# Altium PCB reflow.PcbDoc
Units mm, origin at the board's own origin, x right, y up, seen from the top; angles counter-clockwise.
Board outline 50 x 50 mm, 2 copper layers (Top Layer, Bottom Layer); 59 components, 56 nets, 199 pads, 98 vias.
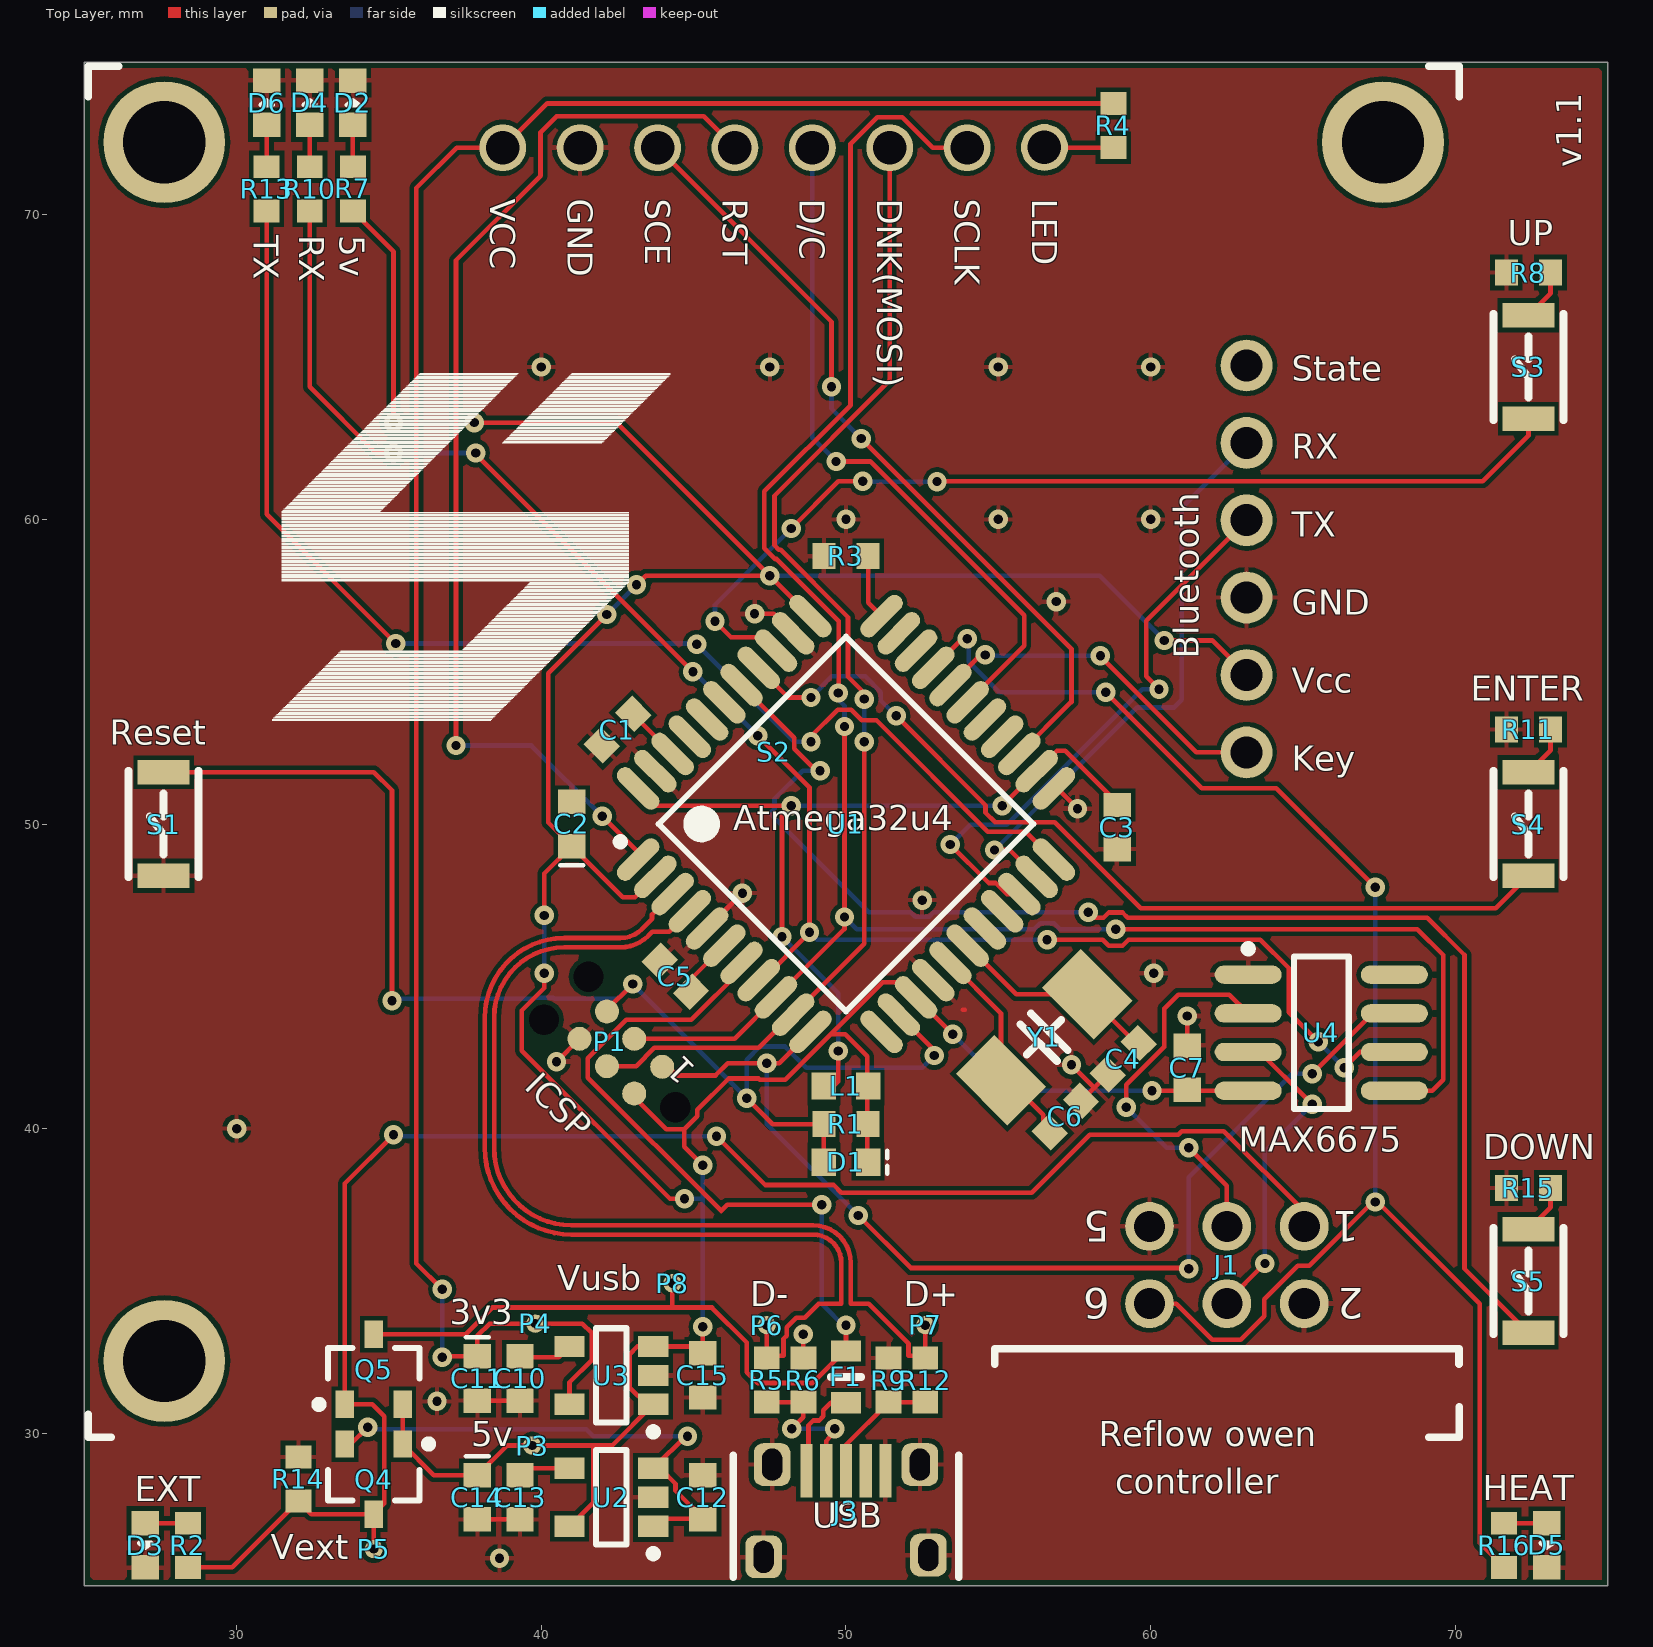
[diagram p0: Top Layer view]
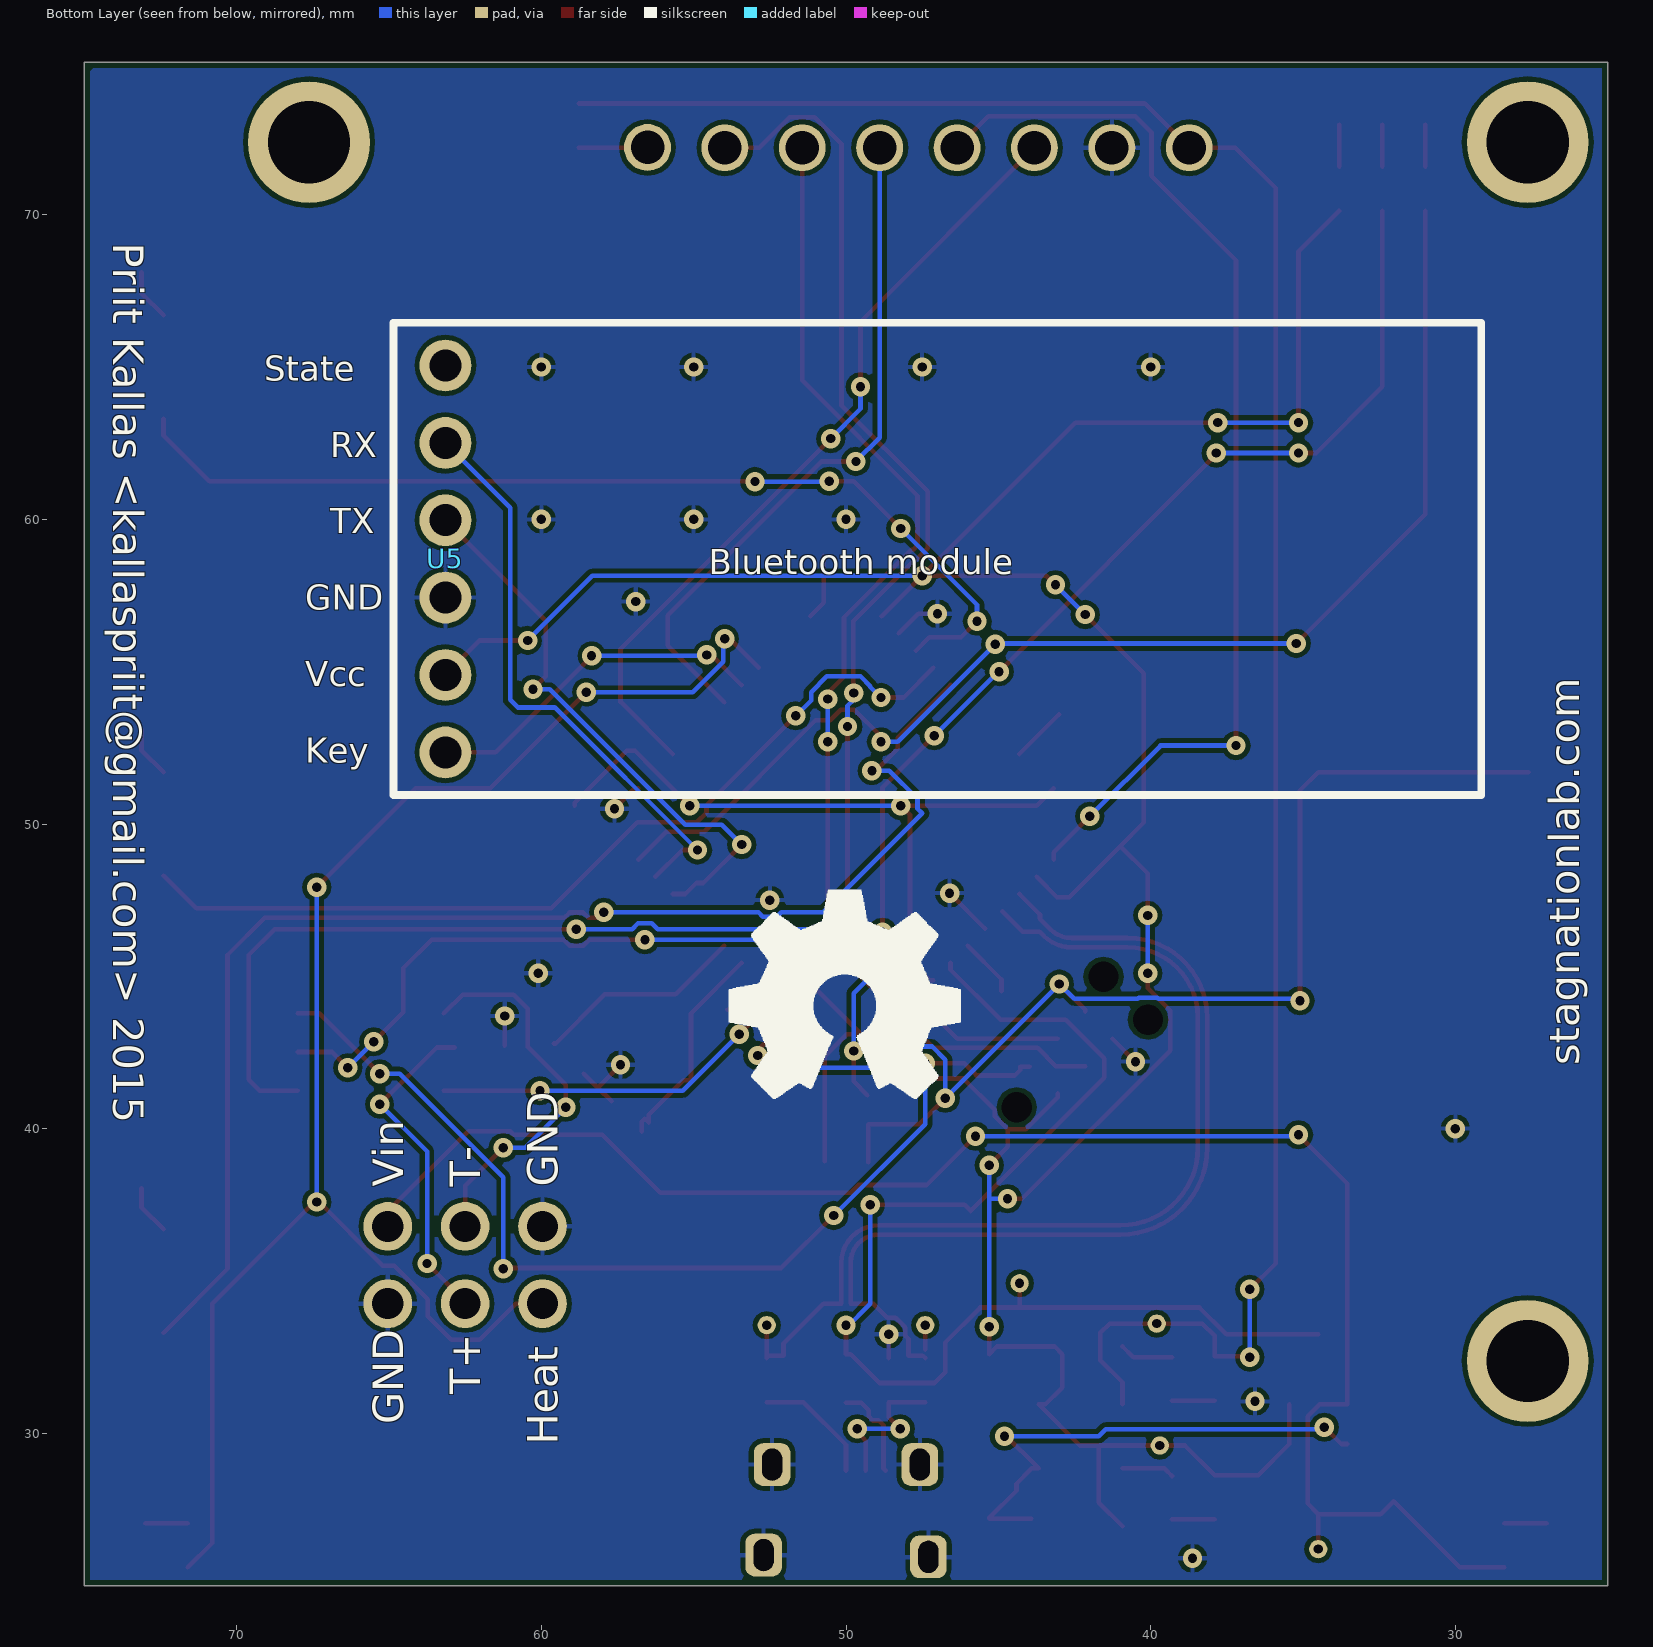
[diagram p1: Bottom Layer view, seen from below]

## Layer stack, top to bottom
Top Solder: solder mask 0.0102, Solder Resist, Dk 3.5
Top Layer: signal copper 0.0356
Dielectric 1: dielectric 0.32, FR-4, Dk 4.8
Bottom Layer: signal copper 0.0356
Bottom Solder: solder mask 0.0102, Solder Resist, Dk 3.5

## Board outline
25,25 75,25 75,75 25,75

## Design rules (kind name [scope] priority, off if disabled: settings)
AssemblyTestPointUsage SilkToBoardRegionClearance [All] p2:
Clearance [All] p1: gap=0.152
DiffPairsRouting [All] p1: maxlimit=0.254 minlimit=0.153 mostfreqgap=0.153 toplayer_minwidth=0.153 toplayer_maxwidth=0.381 toplayer_prefwidth=0.153 bottomlayer_minwidth=0.153 bottomlayer_maxwidth=0.381 bottomlayer_prefwidth=0.153 maxuncoupledlength=12.7
HoleSize [All] p1: absolutevalues=TRUE maxlimit=6.35 minlimit=0.3 maxpercent=80.000 minpercent=20.000
MinimumSolderMaskSliver [All] p1 off: minsoldermaskwidth=0.254
MinimumSolderMaskSliver SilkscreenOverComponentPads_1 [All] p2 off: minsoldermaskwidth=0.254
MinimumSolderMaskSliver SilkToSolderMaskClearance [IsPad] p3 off: minsoldermaskwidth=0.254
MinimumSolderMaskSliver SilkscreenOverComponentPads [All] p4 off: minsoldermaskwidth=0.254
PolygonConnect [All] p1: connectstyle=Relief reliefconductorwidth=0.152 reliefentries=4 polygonreliefangle="90 Angle" airgapwidth=0.152
RoutingVias [All] p1: holewidth=0.305 width=0.635 viastyle="Through Hole" minholewidth=0.305 minwidth=0.635 maxholewidth=0.711 maxwidth=1.27
SilkToBoardRegionClearance SilkToBoardRegionClearance_1 [All] p1:
SilkToSilkClearance [All] p1 off: silktosilkclearance=0.254
SilkToSolderMaskClearance SilkToSolderMaskClearance_1 [IsPad] p1 off: minsilkscreentomaskgap=0.254 clearancetoexposedcopper=TRUE
SolderMaskExpansion [All] p1: expansion=0.102
UnpouredPolygon [All] p1: allowunpoured=FALSE
Width [All] p1: maxlimit=2.54 minlimit=0.152 preferedwidth=0.254
23 further rules are at their usual default settings.

## Components (designator, comment, footprint, x,y, rotation, side; value= is the part's Value field where it differs from the comment)
C1 "Cap" CAP-0603-GEN 42.5,53.1 r225 top
C2 "Cap Pol3" CAP-0603-POL 41,50 r90 top
C3 "Cap" CAP-0603-GEN 58.9,49.9 r90 top
C4 "Cap" CAP-0603-GEN 59.1,42.3 r225 top
C5 "Cap" CAP-0603-GEN 44.4,45 r135 top
C6 "Cap" CAP-0603-GEN 57.2,40.4 r45 top
C7 "Cap" CAP-0603-GEN 61.2,42 r270 top
C10 "Cap" CAP-0603-GEN 39.3,31.8 r90 top
C11 "Cap Pol3" CAP-0603-POL 37.9,31.8 r270 top
C12 "Cap" CAP-0603-GEN 45.3,27.9 r270 top
C13 "Cap" CAP-0603-GEN 39.3,27.9 r90 top
C14 "Cap Pol3" CAP-0603-POL 37.9,27.9 r270 top
C15 "Cap" CAP-0603-GEN 45.3,31.9 r90 top
D1 "CD0603-B00340" DIODE-0603 50,38.9 r0 top
D2 "POWER-ON" LED-0603 33.814,73.675 r90 top
D3 "EXT-PWR" LED-0603 27,26.325 r270 top
D4 "RX" LED-0603 32.4,73.675 r90 top
D5 "ENABLED" LED-0603 73,26.325 r270 top
D6 "TX" LED-0603 30.986,73.675 r90 top
F1 "Resettable fuse 500ma" FUSE-0603 50,31.85 r270 top
J1 "Terminal" HEADER-3x2-RIGHT 62.5,35.525 r180 top
J3 "USB Micro Type B (recommended if hand soldering)" USB-MICRO-B 50,28.775 r0 top
L1 "742792609 ferrite" CAP-0603-GEN 50,41.4 r0 top
P1 "Header 3X2" TAG-CONNECT 42.6,42.5 r135 top
P3 "TESTPOINT" Testpoint 39.7,29.6 r0 top
P4 "TESTPOINT" Testpoint 39.8,33.6 r0 top
P5 "TESTPOINT" Testpoint 34.5,26.2 r0 top
P6 "TESTPOINT" Testpoint 47.4,33.55 r0 top
P7 "TESTPOINT" Testpoint 52.6,33.55 r0 top
P8 "TESTPOINT" Testpoint 44.3,34.925 r0 top
Q4 "PMV48XP" SOT23-3 34.5,28.5 r270 top
Q5 "PMV48XP" SOT23-3 34.5,32.1 r90 top
R1 "Thick Film" RES-0603 50,40.15 r0 top
R2 "Thick Film" RES-0603 28.4,26.325 r270 top
R3 "Thick Film" RES-0603 50,58.8 r0 top
R4 "Thick Film" RES-0603 58.775,72.925 r90 top
R5 "Thick Film" RES-0603 47.4,31.75 r90 top
R6 "Res Varistor" RES-0603 48.6,31.75 r90 top
R7 "Thick Film" RES-0603 33.814,70.847 r270 top
R8 "Thick Film" RES-0603 72.4,68.1 r0 top
R9 "Res Varistor" RES-0603 51.4,31.75 r90 top
R10 "Thick Film" RES-0603 32.4,70.847 r270 top
R11 "Thick Film" RES-0603 72.4,53.1 r0 top
R12 "Thick Film" RES-0603 52.6,31.75 r90 top
R13 "Thick Film" RES-0603 30.986,70.847 r270 top
R14 "Thick Film" RES-0603 32.025,28.5 r90 top
R15 "Thick Film" RES-0603 72.4,38.05 r0 top
R16 "Thick Film" RES-0603 71.6,26.325 r270 top
S1 "Reset switch" TACTILE-SWITCH 27.6,50 r90 top
S2 "NOKIA5110" NOKIA5110 47.625,52.375 r0 top locked
S3 "Tactile switch" TACTILE-SWITCH 72.4,65 r90 top
S4 "Tactile switch" TACTILE-SWITCH 72.4,50 r90 top
S5 "Tactile switch" TACTILE-SWITCH 72.4,35 r90 top
U1 "ATmega32U4-AU" 44ML_N 50,50 r45 top
U2 "5v reg" SOT23-5 42.3,27.9 r180 top
U3 "3.3v reg" SOT23-5 42.3,31.9 r180 top
U4 "MAX6675" SO8_N 65.6,43.15 r0 top
U5 "Bluetooth module" BLUETOOTH-MODULE 63.15,58.7 r270 bottom locked
Y1 "16MHz" XTAL-5032 56.5,43 r45 top

## Footprints (in the part's own frame and the unit in brackets; to place one, negate y for a bottom-side part, rotate by r counter-clockwise, add the part's x,y. Pads: shape width x height; smd on the part's side, far side on the other; paste and mask are expansions set on the pad)
44ML_N [mm] "Thin QFP, 44-Leads, Body 10x10mm, Pitch 0.8mm, IPC Medium Density"
  oval 1.75x0.55 smd: 1(-5.65,4) 2(-5.65,3.2) 3(-5.65,2.4) 4(-5.65,1.6) 5(-5.65,0.8) 6(-5.65,0) 7(-5.65,-0.8) 8(-5.65,-1.6) 9(-5.65,-2.4) 10(-5.65,-3.2) 11(-5.65,-4) 23(5.65,-4) 24(5.65,-3.2) 25(5.65,-2.4) 26(5.65,-1.6) 27(5.65,-0.8) 28(5.65,0) 29(5.65,0.8) 30(5.65,1.6) 31(5.65,2.4) 32(5.65,3.2) 33(5.65,4)
  oval 0.55x1.75 smd: 12(-4,-5.65) 13(-3.2,-5.65) 14(-2.4,-5.65) 15(-1.6,-5.65) 16(-0.8,-5.65) 17(0,-5.65) 18(0.8,-5.65) 19(1.6,-5.65) 20(2.4,-5.65) 21(3.2,-5.65) 22(4,-5.65) 34(4,5.65) 35(3.2,5.65) 36(2.4,5.65) 37(1.6,5.65) 38(0.8,5.65) 39(0,5.65) 40(-0.8,5.65) 41(-1.6,5.65) 42(-2.4,5.65) 43(-3.2,5.65) 44(-4,5.65)
  silkscreen extent -5.77,-4.35 4.35,4.95, body extent -5,-5 5,5, height 1.2
BLUETOOTH-MODULE [mm] "Bluetooth serial module"
  round 1.7 hole 1.05: 1(-6.35,0) 2(-3.81,0) 3(-1.27,0) 4(1.27,0) 5(3.81,0) 6(6.35,0)
  silkscreen extent -7.75,-1.7 7.75,34
CAP-0603-GEN [mm] "Non-polarized 0603 (1608) chip capacitor"
  rect 0.8x0.9 smd: 1(-0.725,0) 2(0.725,0)
  body extent -0.9,-0.43 0.9,0.42, height 0.7
CAP-0603-POL [mm] "0603 (1608) polarized chip capacitor"
  rect 0.8x0.9 smd: 1(-0.725,0) 2(0.725,0)
  silkscreen extent -1.35,-0.38 -1.35,0.38, body extent -0.9,-0.43 0.9,0.42, height 0.7
DIODE-0603 [mm] "0603 (1608) Diode"
  rect 0.8x0.9 smd: 1(-0.725,0) 2(0.725,0)
  silkscreen extent 1.35,-0.38 1.35,0.37, body extent -0.9,-0.43 0.9,0.42, height 0.7
FUSE-0603 [mm] "0603 (1608) resettable fuse"
  rect 0.7x1 smd: 0(-0.85,0) 1(0.85,0)
  silkscreen extent 0,-0.5 0,0.5
HEADER-3x2-RIGHT [mm] "AMPHENOL  T821106A1R100CEU"
  round 1.6 hole 1.02: 1(-2.54,-1.27) 2(-2.54,1.27) 3(0,-1.27) 4(0,1.27) 5(2.54,-1.27) 6(2.54,1.27)
  silkscreen extent -7.62,2.75 7.62,3.25
LED-0603 [mm] "0603 (1608) LED"
  rect 0.8x0.9 smd: 1(-0.725,0) 2(0.725,0)
  silkscreen extent -0.07,-0.2 0.08,0.2, body extent -0.9,-0.43 0.9,0.42, height 0.7
NOKIA5110 [mm] "Nokia 5110 LCD screen"
  round 1.54 hole 1.1: 1(-8.89,19.82) 2(-6.35,19.82) 3(-3.81,19.82) 4(-1.27,19.82) 5(1.27,19.82) 6(3.81,19.82) 7(6.35,19.82) 8(8.89,19.83)
  round 4 hole 2.7: ""(-20,-20) ""(-20,20) ""(20,20)
  silkscreen extent -22.5,-22.5 22.5,22.5
RES-0603 [mm] "0603 (1608) chip resistor"
  rect 0.75x0.85 smd: 1(-0.725,0) 2(0.725,0)
  body extent -0.9,-0.43 0.9,0.43, height 0.7
SO8_N [mm] "SOIC, 8-Leads, Body 4.9x3.9mm, Pitch 1.27mm, IPC Medium Density"
  oval 2.2x0.6 smd: 1(-2.4,1.905) 2(-2.4,0.635) 3(-2.4,-0.635) 4(-2.4,-1.905) 5(2.4,-1.905) 6(2.4,-0.635) 7(2.4,0.635) 8(2.4,1.905)
  silkscreen extent -2.52,-2.5 0.9,2.88, body extent -2,-2.5 2,2.5, height 1.75
SOT23-3 [mm] "SOT23 3-leads mosfet"
  rect 0.9x0.6 smd: 1(-1.15,0.95) 2(-1.15,-0.95) 3(1.15,0)
  silkscreen extent -1.27,-1.5 0.7,1.93, body extent -0.7,-1.5 0.7,1.5, height 1.1
SOT23-5 [mm] "SOT23 5-Leads"
  rect 1x0.7 smd: 1(-1.375,0.95) 2(-1.375,0) 3(-1.375,-0.95) 4(1.375,-0.95) 5(1.375,0.95)
  silkscreen extent -1.5,-1.55 0.5,1.97, body extent -0.88,-1.52 0.87,1.53, height 1.45
TACTILE-SWITCH [mm] "Tactile switch"
  rect 0.8x1.7 smd: 1(-1.7,0) 2(1.7,0)
  silkscreen extent -1.75,-1.15 1.75,1.15
TAG-CONNECT [mm] "Tag-Connect TC-2030-IDC-NL"
  round 0.787 smd: 1(-1.3,-0.635) 2(-1.27,0.635) 3(0,-0.635) 4(0,0.635) 5(1.27,-0.635) 6(1.27,0.635)
  round 0 hole 0.991 unplated: ""(-2.54,0) ""(2.5,-1.016) ""(2.54,1.016)
Testpoint [mm] "Testpoint"
  round 0.6 hole 0.3: 1(0,0)
USB-MICRO-B [mm] "FCI 10103594-0001LF"
  rect 0.4x1.75 smd: 1(-1.3,0) 2(-0.65,0) 3(0,0) 4(0.65,0) 5(1.3,0)
  rrect50% 1.2x1.4 hole 0.66 slot 1.05 at 90 deg: SH(-2.705,-2.83) SH(-2.425,0.2) SH(2.425,0.2) SH(2.705,-2.77)
  silkscreen extent -3.7,-3.5 3.7,0.5
XTAL-5032 [mm] "SMD Crystal 5x3.2mm"
  rect 1.8x2.4 smd: 1(-2,0) 2(2,0)
  silkscreen extent -0.8,-0.85 0.8,0.85

## Part data
C1 C3 C4 C5 C6 C7 C10 C12 C13 C15: "Capacitor"
C2 C11 C14: "Polarized Capacitor (Surface Mount)"
D1: library part Diode, "Default Diode"
D2 D3 D4 D5 D6: library part LED2, "Typical RED, GREEN, YELLOW, AMBER GaAs LED"
F1: library part MF-MSMF, "Bourns resettable fuse"
J1: library part SCREW-TERMINAL-6, "Screw terminal"
J3: library part USB_Micro_TypeB_FCI, "Connector SMD-THD USB Micro Type B middle mount"
L1: library part 742792609, "SMD EMI Suppression Ferrite Bead WE-CBF, Z = 30 Ohm"
P1: "Header, 3-Pin, Dual row"
Q4 Q5: library part MOSFET-P, "P-Channel MOSFET"
R1 R2 R3 R4 R5 R7 R8 R10 R11 R12 R13 R14 R15 R16: library part RES_820R_0603_1%, "Resistor SMD chip 820 Ohm 0.1W 1% 0603"
R6 R9: "Varistor (Voltage-Sensitive Resistor)"
S1: library part SW-PB, "Switch"
S3 S4 S5: library part TACTILE-SWITCH-2
U1: "8-bit AVR Microcontroller, 2.7-5.5V, 16MHz, 32KB Flash, 1KB EEPROM, 2.5KB SRAM, USB Controller, 44-pin TQFP, Industrial Grade (-40°C to 85°C), Ext Osc"
U2 U3: library part SOT23-REG, "Voltage regulator"
U5: library part BLUETOOTH-MODULE
Y1: library part XTAL, "Crystal Oscillator"

## Via types
v1: diameter 0.635, hole 0.305, Top Layer to Bottom Layer, tented both sides, 98 vias

## Nets (pads, with @x,y where several pads share a name; then routed paths per layer and width w, separated by ;. In a path a pad name is that pad's centre, name@x,y a point inside that pad or via, vN(x,y) a via of type N, cw(c..) or ccw(c..) an arc to the next point about the centre after c; other vN are vias at no path point)
3V3: C11.1 P4.1 R4.2 S2.1 U3.5 | length 71.3
  Top Layer w0.152: v1(36.75,32.5) 36.775,32.525 C11.1 37.9,33.2 38.3,33.6 P4.1 41.348,33.6 41.654,33.295 41.654,32.405 40.925,31.677 U3.5 ; v1(36.75,34.725) 35.9,35.575 35.9,70.875 37.22,72.195 S2.1 40.19,73.65 R4.2
  Bottom Layer w0.152: v1(36.75,32.5) v1(36.75,34.725)
5V: C2.1 C7.2 C14.1 C15.2 D1.2 L1.2 P1.2 P3.1 Q4.1 Q5.2 R1.2 R7.2 U1.2 U1.14 U1.34 U2.5 U3.1 U3.3 U4.4 U5.5 | length 130.9
  Top Layer w0.152: R7.2@33.827,70.122 R7.2 35.15,68.786 v1(35.15,63.175) ; Q5.2 Q4.1 36.475,28.625 C14.1 38.875,29.6 P3.1 41.7,29.6 ; v1(37.8,63.175) 42.475,63.175 v1(47.5,58.15) ; v1(40.1,45.1) 40.1,44.616 39.361,43.878 39.361,42.562 44.224,37.7 v1(44.7,37.7) ; v1(40.1,47) 40.1,48.375 C2.1 ; U2.5 41.7,27.725 41.7,29.6 ; v1(42.15,56.875) 40.225,54.95 40.225,50.05 C2.1 ; P1.2 43.049,41.027 44.096,39.98 44.696,39.98 ; v1(43.125,57.85) 43.425,58.15 v1(47.5,58.15) ; U1.2 43.075,47.6 42.675,47.6 C2.1 ; v1(45.3,33.5) 45.3,32.6 45.05,32.85 U3.3 43.15,32.85 42.9,32.6 42.9,31.502 43.452,30.95 U3.1 42.325,29.6 41.7,29.6 ; v1(45.3,38.8) 44.696,39.404 44.696,39.98 ; 49.524,43.096 49.976,43.096 50.7,42.372 D1.2@50.7,38.925 ; v1(53.5,43.1) 52.298,44.302 U1.14 51.806,44.8 51.2,44.8 48.004,41.604 47.174,41.604 47.132,41.646 46.146,41.646 45.12,40.62 45.12,40.404 44.696,39.98 ; v1(60.045,41.245) U4.4 ; v1(60.45,56.025) 62.015,56.025 U5.5 ; v1(47.5,58.15) 48.154,57.496 ; 48.154,57.496 48.826,56.824 U1.34 48.161,57.496 48.154,57.496
  Bottom Layer w0.152: v1(35.15,63.175) v1(37.8,63.175) ; v1(40.1,45.1) v1(40.1,47) ; v1(42.15,56.875) v1(43.125,57.85) ; v1(44.7,37.7) 45.3,37.7 ; v1(45.3,33.5) 45.3,36.2 v1(45.3,38.8) ; v1(47.5,58.15) 58.325,58.15 v1(60.45,56.025) ; v1(53.5,43.1) 55.355,41.245 58.973,41.245 58.974,41.246 60.044,41.246 v1(60.045,41.245)
A0: S3.1 U1.36 | length 32.5
  Top Layer w0.152: v1(45.7,56.65) 46.224,56.126 47.268,56.126 U1.36 ; v1(48.2,59.7) 49.75,61.25 v1(50.55,61.25) ; v1(52.989,61.239) 53,61.25 70.9,61.25 72.4,62.75 S3.1
  Bottom Layer w0.152: v1(45.7,56.65) 45.7,57.2 v1(48.2,59.7) ; v1(50.55,61.25) 50.561,61.239 v1(52.989,61.239)
A1: S4.1 U1.37 | length 29.9
  Top Layer w0.152: U1.37 48.113,54.15 v1(48.85,54.15) ; v1(51.65,53.55) 54.579,50.621 54.579,50.374 54.899,50.054 55.352,50.054 55.353,50.055 56.847,50.055 59.673,47.229 71.329,47.229 S4.1
  Bottom Layer w0.152: v1(48.85,54.15) 48.858,54.15 49.204,54.496 49.204,54.526 49.524,54.846 50.626,54.846 51.146,54.326 51.146,54.054 v1(51.65,53.55)
A2: S5.1 U1.38 | length 44.3
  Top Layer w0.152: U1.38 48.304,52.827 48.304,52.474 49.028,51.75 v1(49.15,51.75) ; v1(57.95,47.1) 58.126,46.924 58.452,46.924 58.624,47.096 59.076,47.096 59.248,46.924 69.076,46.924 70.3,45.7 70.3,35.4 S5.1
  Bottom Layer w0.152: v1(49.15,51.75) 48.578,51.75 47.654,50.826 47.654,50.504 47.5,50.35 50.75,47.1 52.128,47.1 52.274,46.954 52.726,46.954 52.872,47.1 v1@57.642,47.1
A3: U1.39
A4: U1.40
A5: U1.41
D0/RX: U1.20 U5.3 | length 19
  Top Layer w0.152: v1(53.425,49.325) 54.686,48.064 54.911,48.064 55.273,47.702 U1.20 ; v1(60.275,54.425) 59.85,54.85 59.85,56.67 U5.3
  Bottom Layer w0.152: v1(53.425,49.325) 54.075,49.975 55.273,49.975 59.723,54.425 v1(60.275,54.425)
D1/TX: U1.21 U5.2 | length 19.3
  Top Layer w0.152: v1(54.875,49.146) 55.379,49.146 U1.21
  Bottom Layer w0.152: v1(54.875,49.146) 59.554,53.825 60.775,53.825 61.025,54.075 61.025,60.385 U5.2
D2/SDA: U1.19
D3/SCL: U1.18
D4/PWM: S2.3 U1.25 | length 26.2
  Top Layer w0.152: S2.3 49.525,66.485 v1(49.525,64.35) ; v1(50.5,62.65) 57.4,55.75 57.4,54.006 U1.25
  Bottom Layer w0.152: v1(49.525,64.35) 49.525,63.625 v1(50.5,62.65)
D5/PWM: U1.31
D6/PWM: U1.27
D7: S2.4 U1.1 | length 36
  Top Layer w0.152: v1(37.2,52.575) 37.2,68.5 39.975,71.275 39.975,72.7 40.5,73.225 45.325,73.225 S2.4 ; v1(42,50.25) 43.176,49.074 U1.1
  Bottom Layer w0.152: v1(37.2,52.575) 39.675,52.575 v1(42,50.25)
D8: S2.5 U1.28 | length 22.5
  Top Layer w0.152: v1(49.675,61.9) 50.8,61.9 55.85,56.85 55.85,55.85 U1.28
  Bottom Layer w0.152: S2.5 48.895,62.68 v1(49.675,61.9)
D9/PWM: U1.29 U5.6 | length 11.5
  Top Layer w0.152: U1.29 54.419,55.55 v1(54.575,55.55) ; v1(58.35,55.525) 58.35,55.5 61.5,52.35 U5.6
  Bottom Layer w0.152: v1(54.575,55.55) 54.55,55.525 v1(58.35,55.525)
D10/PWM: J1.6 R16.2 U1.30 | length 53.3
  Top Layer w0.152: U1.30 53.815,56.078 v1(53.978,56.078) ; v1(58.525,54.325) 61.675,51.175 64.125,51.175 v1(67.375,47.925) ; J1.6 60.845,34.255 62.025,33.075 62.95,33.075 63.725,33.85 63.725,34.395 64.83,35.5 65.2,35.5 v1@67.375,37.675 ; v1(67.375,37.593) v1@67.375,37.675 ; R16.2 70.8,26.4 70.8,34.25 v1@67.375,37.675
  Bottom Layer w0.152: v1@54.197,56.078 v1(53.978,56.078) 54.029,56.026 54.029,55.324 55.028,54.325 v1(58.525,54.325) ; v1(67.375,37.593) v1(67.375,47.925)
D11/PWM: U1.12
D12/PWM: U1.26
D13/PWM: U1.32
D+: P7.1 R12.2 U1.4 | length 32.1
  Top Layer w0.152: R12.2 P7.1
  Top Layer w0.153: U1.4 44.201,46.463 43.646,46.463 43.516,46.334 cw(c42.59,47.26) 42.59,45.95 40.75,45.95 ccw(c40.75,43.65) 38.45,43.65 38.45,39.369 ccw(c40.99,39.369) 40.99,36.829 48.924,36.829 cw(c48.924,35.6) 50.153,35.6 50.153,34.25 50.749,34.25 52.054,32.945 52.054,32.551 52.523,32.551 R12.2
D-: P6.1 R5.2 U1.3 | length 32.2
  Top Layer w0.152: R5.2@47.4,32.75 P6.1
  Top Layer w0.153: U1.3 43.635,47.029 43.635,46.885 43.3,46.55 cw(c42.59,47.26) 42.59,46.256 40.75,46.256 ccw(c40.75,43.65) 38.144,43.65 38.144,39.369 ccw(c40.99,39.369) 40.99,36.524 48.924,36.524 cw(c48.924,35.6) 49.847,35.6 49.847,34.25 49.1,34.25 48.646,33.796 48.374,33.796 48.054,33.476 48.054,33.204 47.946,33.096 47.946,32.551 47.477,32.551 R5.2
GND: C1.2 C2.2 C3.1 C4.2 C5.2 C6.2 C7.1 C10.1 C11.2 C12.1 C13.1 C14.2 C15.1 D2.2 D3.2 D4.2 D5.2 D6.2 J1.2 J1.5 J3.5 J3.SH P1.6 R3.1 R6.2 R8.1 R9.2 R11.1 R14.2 R15.1 S1.1 S2.2 U1.5 U1.15 U1.23 U1.35 U1.43 U2.2 U3.2 U4.1 U5.4 | length 12.3
  Top Layer w0.153: C14.2 C13.1 ; C11.2 C10.1 ; v1@40.504,42.2 P1.6 ; U1.5 v1(46.6,47.731) ; v1(47,56.9) 47.625,56.9 U1.35 ; R6.2 v1(48.6,33.25) ; R3.1 R3.1@49.3,58.775 ; 53.837,43.9 53.9,43.9 ; U1.23 56.933,51.167 v1(57.6,50.5) ; v1(57.4,42.1) 58.15,41.35 ; C6.2@57.695,40.895 58.15,41.35 ; C4.2@58.605,41.805 58.15,41.35 ; C7.1 v1(61.2,43.7)
  other v1: 38.625,25.9 36.575,31.05 30,40 40.5,42.2 60.1,45.1 52.5,47.5 56.9,57.3 50,60 55,60 60,60 40,65 47.5,65 55,65 60,65
HWB: R3.2 U1.33 | length 2.2
  Top Layer w0.152: R3.2 50.725,57.265 U1.33
MISO: P1.1 U1.11 U4.7 | length 35.4
  Top Layer w0.152: P1.1 44.286,42.03 44.286,41.925 44.464,41.746 45.715,41.746 46.119,42.15 v1(47.4,42.15) 47.807,42.15 U1.11 ; v1(50.4,37.15) 52.121,35.429 61.221,35.429 v1(61.25,35.4) ; v1(65.3,41.8) 67.285,43.785 U4.7
  Bottom Layer w0.152: v1(47.4,42.15) 47.4,40.15 v1(50.4,37.15) ; v1(61.25,35.4) 61.25,38.4 64.65,41.8 v1(65.3,41.8)
MOSI: P1.4 S2.6 U1.10 | length 39.1
  Top Layer w0.152: P1.4 43.11,42.051 43.711,42.652 47.13,42.652 48.22,43.742 U1.10 50.6,46.075 v1(50.6,52.7) ; v1(50.6,54.1) 50.6,54.3 50.066,54.834 50.066,56.787 47.852,59.001 47.799,59.001 47.654,59.146 47.654,60.779 51.435,64.56 S2.6
  Bottom Layer w0.152: v1(50.6,52.7) v1(50.6,54.1)
NetC1_1: C1.1 U1.42 | length 1.8
  Top Layer w0.152: C1.1@42.995,53.595 43.011,53.595 U1.42
NetC3_2: C3.2 L1.1 U1.24 U1.44 | length 28.1
  Top Layer w0.152: U1.44 43.743,50.6 v1(48.2,50.6) 47.9,50.3 v1(47.9,46.3) ; L1.1@49.3,41.1 49.75,41.55 v1(49.75,42.55) ; v1(55.125,50.6) U1.24 56.925,52.4 57.2,52.4 58.9,50.7 C3.2@58.9,50.6
  Bottom Layer w0.152: v1(47.9,46.3) 49.75,44.45 v1(49.75,42.55) ; v1(48.2,50.6) v1(55.125,50.6)
NetC5_1: C5.1 U1.6 | length 2
  Top Layer w0.152: C5.1@44.895,44.505 44.895,44.895 U1.6
NetC10_2: C10.2 U3.4 | length 1.8
  Top Layer w0.152: C10.2@39.3,32.5 40.575,32.5 U3.4
NetC12_2: C12.2 Q4.2 U2.1 U2.3 | length 17.1
  Top Layer w0.152: Q4.2 33.75,29.65 v1(34.3,30.2) ; U2.1@43.925,27.2 45.3,27.2 45.3,27.225 44.404,28.121 44.404,28.345 43.898,28.85 U2.3 44.8,29.975 v1(44.8,29.9)
  Bottom Layer w0.152: v1(34.3,30.2) 34.371,30.129 41.471,30.129 41.7,29.9 v1(44.8,29.9)
NetC13_2: C13.2 U2.4 | length 1.7
  Top Layer w0.152: C13.2@39.3,28.6 39.55,28.85 U2.4
NetD2_1: D2.1 R7.1 | length 1.4
  Top Layer w0.152: R7.1 D2.1
NetD3_1: D3.1 R2.1 | length 1.4
  Top Layer w0.152: D3.1 R2.1
NetD4_1: D4.1 R10.1 | length 1.4
  Top Layer w0.152: R10.1 D4.1
NetD5_1: D5.1 R16.1 | length 1.4
  Top Layer w0.152: R16.1 D5.1
NetD6_1: D6.1 R13.1 | length 1.4
  Top Layer w0.152: R13.1 D6.1
NetJ3_2: J3.2 R5.1 R6.1 | length 5.1
  Top Layer w0.152: R5.1 R6.1 48.6,30.531 48.224,30.155 v1(48.224,30.149) ; J3.2 49.35,29.747 49.667,30.113 v1@49.676,30.124
  Bottom Layer w0.152: v1(48.224,30.149) v1(49.626,30.149)
NetJ3_3: J3.3 R9.1 R12.1 | length 4
  Top Layer w0.152: J3.3 50,29.625 R9.1 R12.1
NetR4_1: R4.1 S2.8 | length 2.3
  Top Layer w0.152: S2.8 56.52,72.2 R4.1
NetR8_2: R8.2 S3.2 | length 1.7
  Top Layer w0.152: S3.2 73.125,67.425 R8.2
NetR11_2: R11.2 S4.2 | length 1.7
  Top Layer w0.152: S4.2 73.125,52.425 R11.2
NetR15_2: R15.2 S5.2 | length 1.7
  Top Layer w0.152: S5.2 73.125,37.425 R15.2
RESET: D1.1 P1.5 R1.1 S1.2 U1.13 | length 43.4
  Top Layer w0.152: S1.2 34.5,51.7 35.1,51.1 v1(35.1,44.2) ; P1.5 42.151,43.901 v1(42.996,44.746) ; v1(46.742,41) 47.592,40.15 R1.1 D1.1 ; U1.13 52.9,42.575 v1(52.9,42.4)
  Bottom Layer w0.152: v1(35.1,44.2) 35.162,44.262 39.746,44.262 39.786,44.302 40.385,44.302 40.425,44.262 42.512,44.262 v1(42.996,44.746) v1(46.742,41) 46.742,42.264 47.174,42.696 47.996,42.696 48.692,42 52.5,42 v1(52.9,42.4)
RX-LED/SS: R10.2 U1.8 U4.6 | length 57
  Top Layer w0.152: R10.2 32.4,64.35 34.572,62.178 v1(35.15,62.178) ; v1(37.85,62.175) 37.825,62.15 v1(44.975,55) ; v1(47.1,52.9) 48.8,51.2 v1(48.8,46.45) 48.8,46.428 47.246,44.873 U1.8 ; v1(56.6,46.2) 58.428,46.2 58.624,46.004 59.076,46.004 59.272,46.2 63.603,46.2 64.529,45.274 64.529,43.821 v1(65.5,42.85) ; v1(66.35,42) 66.865,42.515 U4.6
  Bottom Layer w0.152: v1(35.15,62.178) 35.153,62.175 v1(37.85,62.175) ; v1(44.975,55) 45,55 v1(47.1,52.9) ; v1(48.8,46.45) 49.05,46.2 v1(56.6,46.2) ; v1(65.5,42.85) v1(66.35,42)
SCK: P1.3 S2.7 U1.9 U4.5 | length 67.7
  Top Layer w0.152: P1.3 43.057,42.957 46.351,42.957 U1.9 49.95,46.556 v1(49.95,53.2) ; v1(49.75,54.3) 49.75,54.1 49.761,54.089 49.761,56.661 47.726,58.696 47.673,58.696 47.322,59.047 47.322,60.922 50.15,63.75 50.15,72.322 51.021,73.194 51.849,73.194 52.847,72.195 S2.7 ; v1(58.85,46.55) 68.75,46.55 69.6,45.7 69.6,41.6 69.245,41.245 U4.5
  Bottom Layer w0.152: v1(49.75,54.3) 49.75,54.078 49.95,53.878 v1(49.95,53.2) ; v1(49.95,46.95) 50.35,46.55 56.178,46.55 56.374,46.746 56.826,46.746 57.022,46.55 v1(58.85,46.55)
T+: J1.4 U4.3 | length 10.9
  Top Layer w0.152: J1.4 62.5,34.325 v1(63.75,35.575) ; U4.3@62.85,42.665 63.435,42.665 v1(65.3,40.8)
  Bottom Layer w0.152: v1(63.75,35.575) 63.75,39.25 v1(65.3,40.8)
T-: J1.3 U4.2 | length 12.9
  Top Layer w0.152: v1(59.2,40.7) 59.2,41.44 60.442,42.683 60.442,43.942 60.9,44.4 62.585,44.4 U4.2 ; v1@61.495,39.375 v1(61.25,39.375) 62.5,38.125 J1.3
  Bottom Layer w0.152: v1(59.2,40.7) 60.525,39.375 v1(61.25,39.375)
TX-LED: R13.2 U1.22 | length 41.5
  Top Layer w0.152: R13.2 30.986,60.164 v1(35.225,55.925) ; v1(48.85,52.7) 48.85,52.872 49.724,53.746 50.176,53.746 50.522,53.4 51,53.4 54.651,49.749 55.478,49.749 55.479,49.75 55.907,49.75 U1.22
  Bottom Layer w0.152: v1(35.225,55.925) 45.075,55.925 v1(45.1,55.9) 48.3,52.7 v1(48.85,52.7)
VBUS: F1.1 J3.1 | length 3.2
  Top Layer w0.152: J3.1 48.77,28.845 48.77,30.27 48.921,30.421 49.12,30.421 49.254,30.555 49.254,30.754 49.5,31 F1.1
VIN: J1.1 P5.1 Q4.3 Q5.1 R2.2 R14.1 | length 55.8
  Top Layer w0.152: R2.2 29.85,25.6 R14.1 32.45,27.35 Q4.3 ; P5.1 Q4.3 ; v1(35.15,39.8) 33.55,38.2 Q5.1 34.45,30.95 34.846,30.554 34.846,27.696 Q4.3 ; v1(45.75,39.75) 47.35,38.15 49.594,38.15 49.849,37.895 56.095,37.895 58,39.8 60.903,39.8 61.024,39.921 62.404,39.921 65.04,37.285 J1.1
  Bottom Layer w0.152: v1(35.15,39.8) 35.15,39.75 v1(45.75,39.75)
VUSB: F1.0 P8.1 Q5.3 U1.7 | length 40.3
  Top Layer w0.152: Q5.3 37.519,33.25 38.398,34.129 44.275,34.129 ; P8.1 44.3,34.154 44.275,34.129 ; U1.7 46.571,45.221 44.921,43.571 42.791,43.571 41.529,42.309 41.529,41.671 45.9,37.3 46.1,37.5 v1(49.2,37.5) ; v1@50,33.45 50,32.6 49.848,32.6 48.898,31.65 47.102,31.65 46.746,32.005 46.746,32.982 45.6,34.129 44.275,34.129
  Bottom Layer w0.152: v1@49.2,37.25 49.2,34.25 v1@50,33.45
  other v1: 50,33.55
XTAL1: C4.1 U1.17 Y1.2 | length 6.9
  Top Layer w0.152: U1.17 55.586,44.414 Y1.2 59.533,42.795 C4.1@59.595,42.795
XTAL2: C6.1 U1.16 Y1.1 | length 7.3
  Top Layer w0.152: U1.16 55.086,43.783 Y1.1 55.345,41.586 56.475,40.456 56.475,40.204 56.601,40.33 56.705,40.226 C6.1@56.705,39.905
pads on no net: J3.4 P1. S2. U4.8 U5.1

## Polygon pours and split planes (outlines as drawn)
GND on Top Layer "Top GND" (solid, pour order 2): 25.2,25.2 25.2,74.8 74.8,74.8 74.8,25.2
GND on Bottom Layer "Bottom GND" (solid, pour order 4): 25.2,25.2 25.2,74.8 74.8,74.8 74.8,25.2

## Silkscreen, mask and mechanical layers (free items; w line width, h text height)
Top Overlay:
  drawing of 361 lines, arcs and shapes, not listed
  text "v1.1" at 74.125,71.55 h0.81 r90
  text "TX" at 30.562,69.328 h0.81 r270
  text "RX" at 32.046,69.328 h0.81 r270
  text "5v" at 33.39,69.328 h0.81 r270
  text "UP" at 71.723,69 h0.81
  text "State" at 64.625,64.55 h0.81
  text "RX" at 64.625,61.99 h0.81
  text "TX" at 64.625,59.43 h0.81
  text "GND" at 64.625,56.87 h0.81
  text "Bluetooth" at 61.575,55.425 h0.81 r90
  text "Vcc" at 64.625,54.31 h0.81
  text "ENTER" at 70.504,54.05 h0.81
  text "Reset" at 25.84,52.6 h0.81
  text "Key" at 64.625,51.75 h0.81
  text "Atmega32u4" at 46.3,49.8 h0.81
  text "ICSP" at 39.4,41.35 h0.81 r315
  text "MAX6675" at 62.892,39.25 h0.81
  text "DOWN" at 70.91,39 h0.81
  text "Vusb" at 40.525,34.7 h0.81
  text "D-" at 46.85,34.175 h0.81
  text "D+" at 51.9,34.175 h0.81
  text "3v3" at 37,33.575 h0.81
  text "5v" at 37.7,29.575 h0.81
  text "Reflow owen" at 58.302,29.575 h0.81
  text "controller" at 58.844,28.025 h0.81
  text "EXT" at 26.65,27.775 h0.81
  text "HEAT" at 70.9,27.8 h0.81
  text "USB" at 48.9,26.9 h0.81
  text "Vext" at 31.125,25.875 h0.81
Bottom Overlay:
  drawing of 491 lines, arcs and shapes, not listed
  text "Priit Kallas <kallaspriit@gmail.com> 2015" at 74.052,69.077 h1 r90
  text "stagnationlab.com" at 25.925,42.086 h1 r270
  text "GND" at 59.46,38.1 h1 r270
  text "T-" at 62,38.1 h1 r270
  text "Vin" at 64.54,38.1 h1 r270
  text "T+" at 62,31.291 h1 r270
  text "GND" at 64.54,30.291 h1 r270
  text "Heat" at 59.46,29.625 h1 r270
Mechanical 1:
  the board outline again, w0.254

## Text inside footprints (layer, text, board x,y; h text height)
J1: Top Overlay "6" at 58.65,34.755 h1 r180; Top Overlay "5" at 58.65,37.295 h1 r180; Top Overlay "2" at 67,34.755 h1 r180; Top Overlay "1" at 66.833,37.295 h1 r180
P1: Top Overlay "1" at 45.114,41.961 h0.81 r135
S2: Top Overlay "LED" at 56.109,70.525 h0.81 r270; Top Overlay "SCLK" at 53.569,70.525 h0.81 r270; Top Overlay "DNK(MOSI)" at 51.029,70.525 h0.81 r270; Top Overlay "D/C" at 48.489,70.525 h0.81 r270; Top Overlay "RST" at 45.949,70.525 h0.81 r270; Top Overlay "SCE" at 43.409,70.525 h0.81 r270; Top Overlay "GND" at 40.869,70.525 h0.81 r270; Top Overlay "VCC" at 38.329,70.525 h0.81 r270
U5: Bottom Overlay "State" at 69.101,64.55 h0.81; Bottom Overlay "RX" at 66.934,62.043 h0.81; Bottom Overlay "TX" at 66.934,59.537 h0.81; Bottom Overlay "GND" at 67.747,57.03 h0.81; Bottom Overlay "Vcc" at 67.747,54.523 h0.81; Bottom Overlay "Key" at 67.747,52.017 h0.81